# Altium PCB black_V61.PcbDoc
Units mil, origin at the board's own origin, x right, y up, seen from the top; angles counter-clockwise.
Board outline 3814 x 3789 mil, 2 copper layers (Top Layer, Bottom Layer); 68 components, 79 nets, 208 pads, 54 vias.
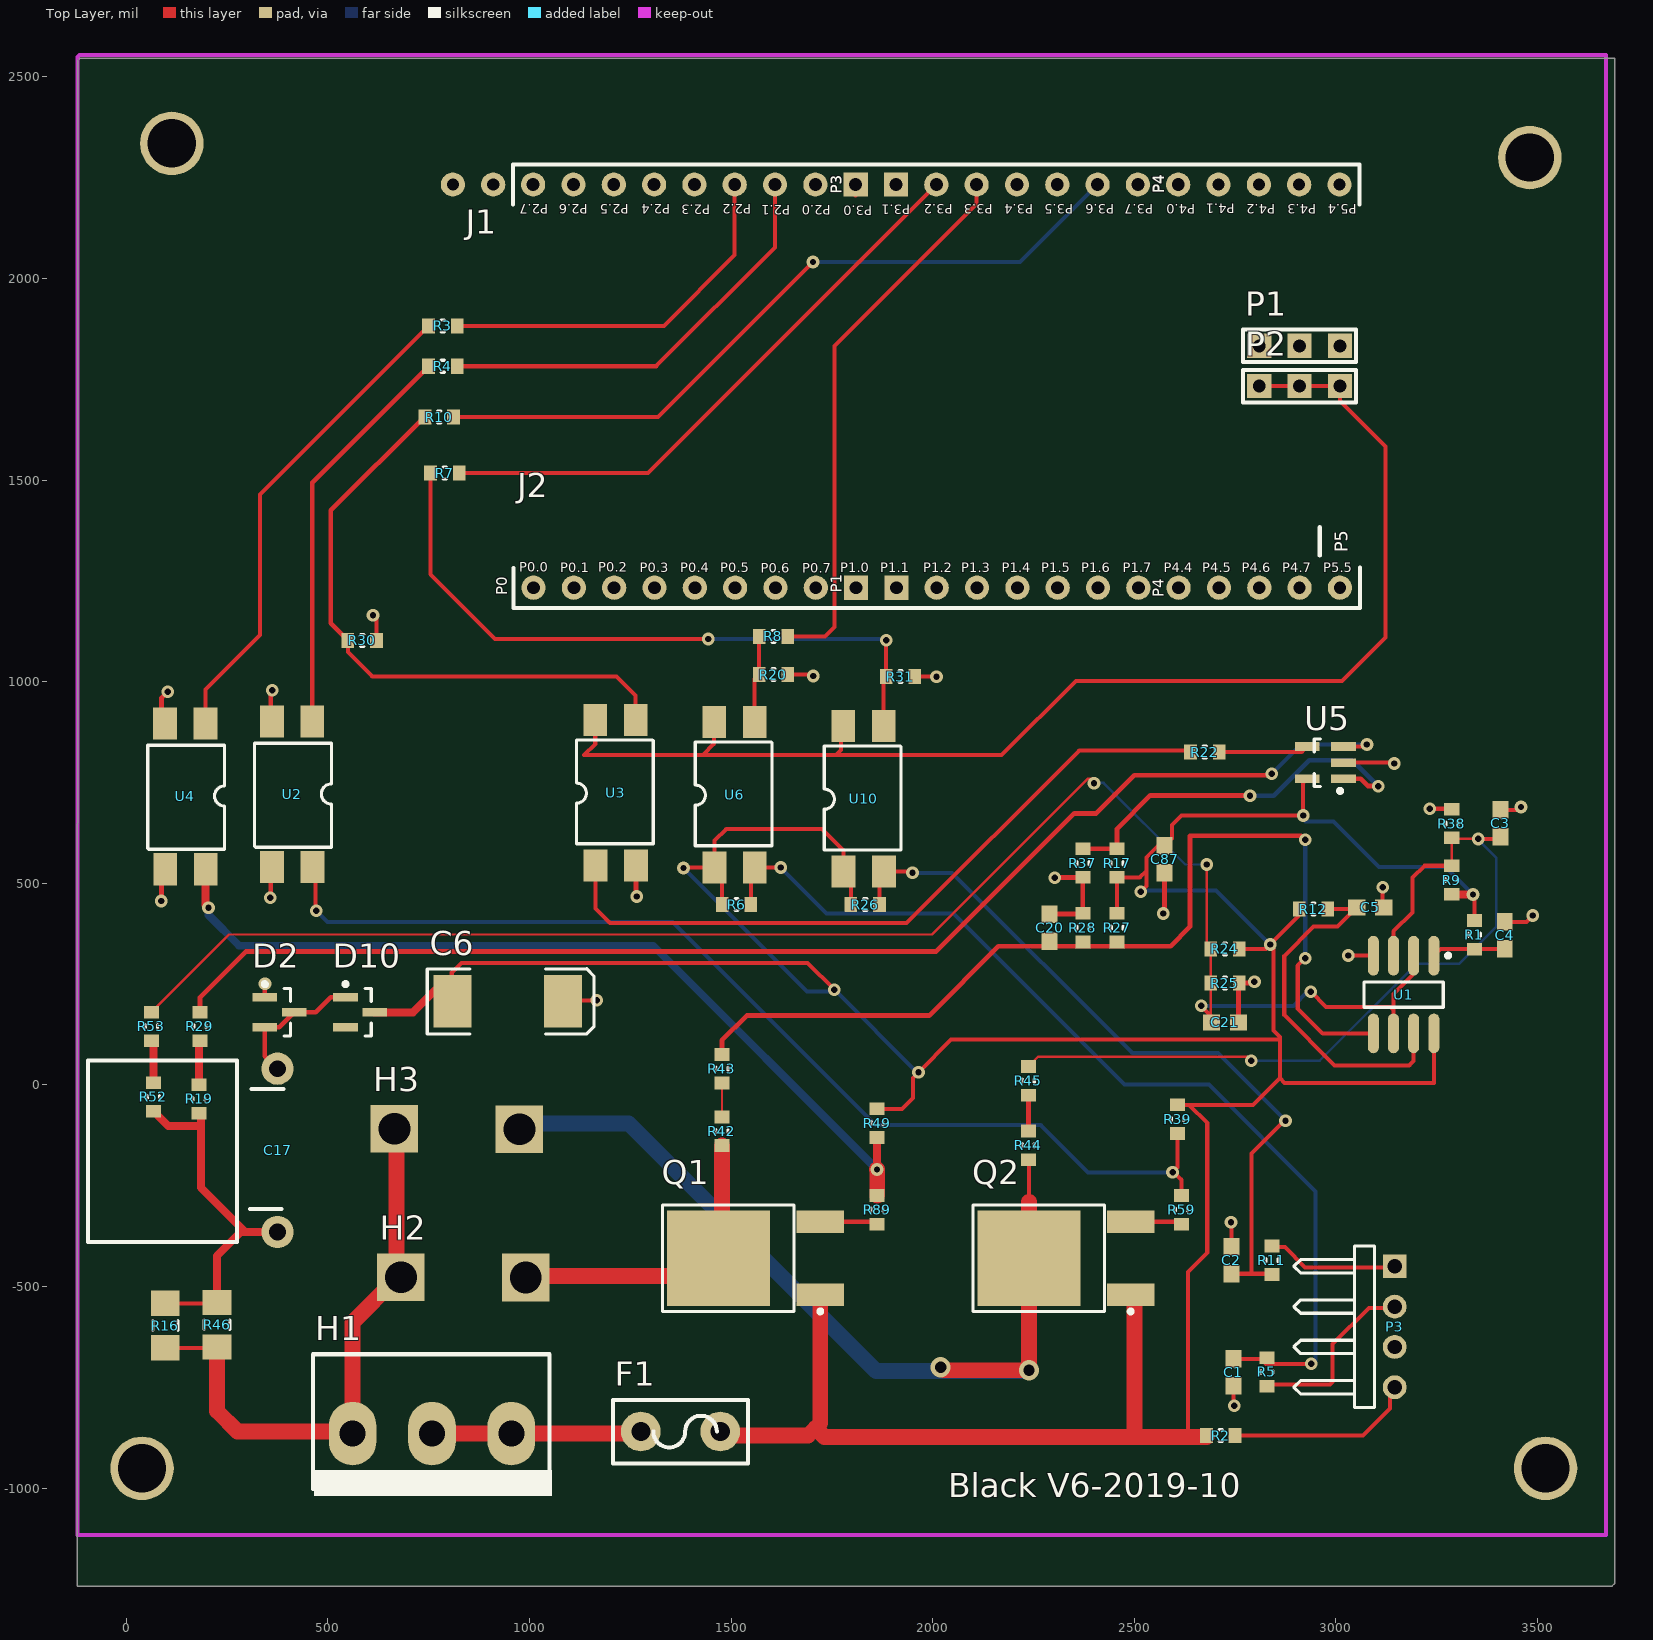
[diagram p0: Top Layer view]
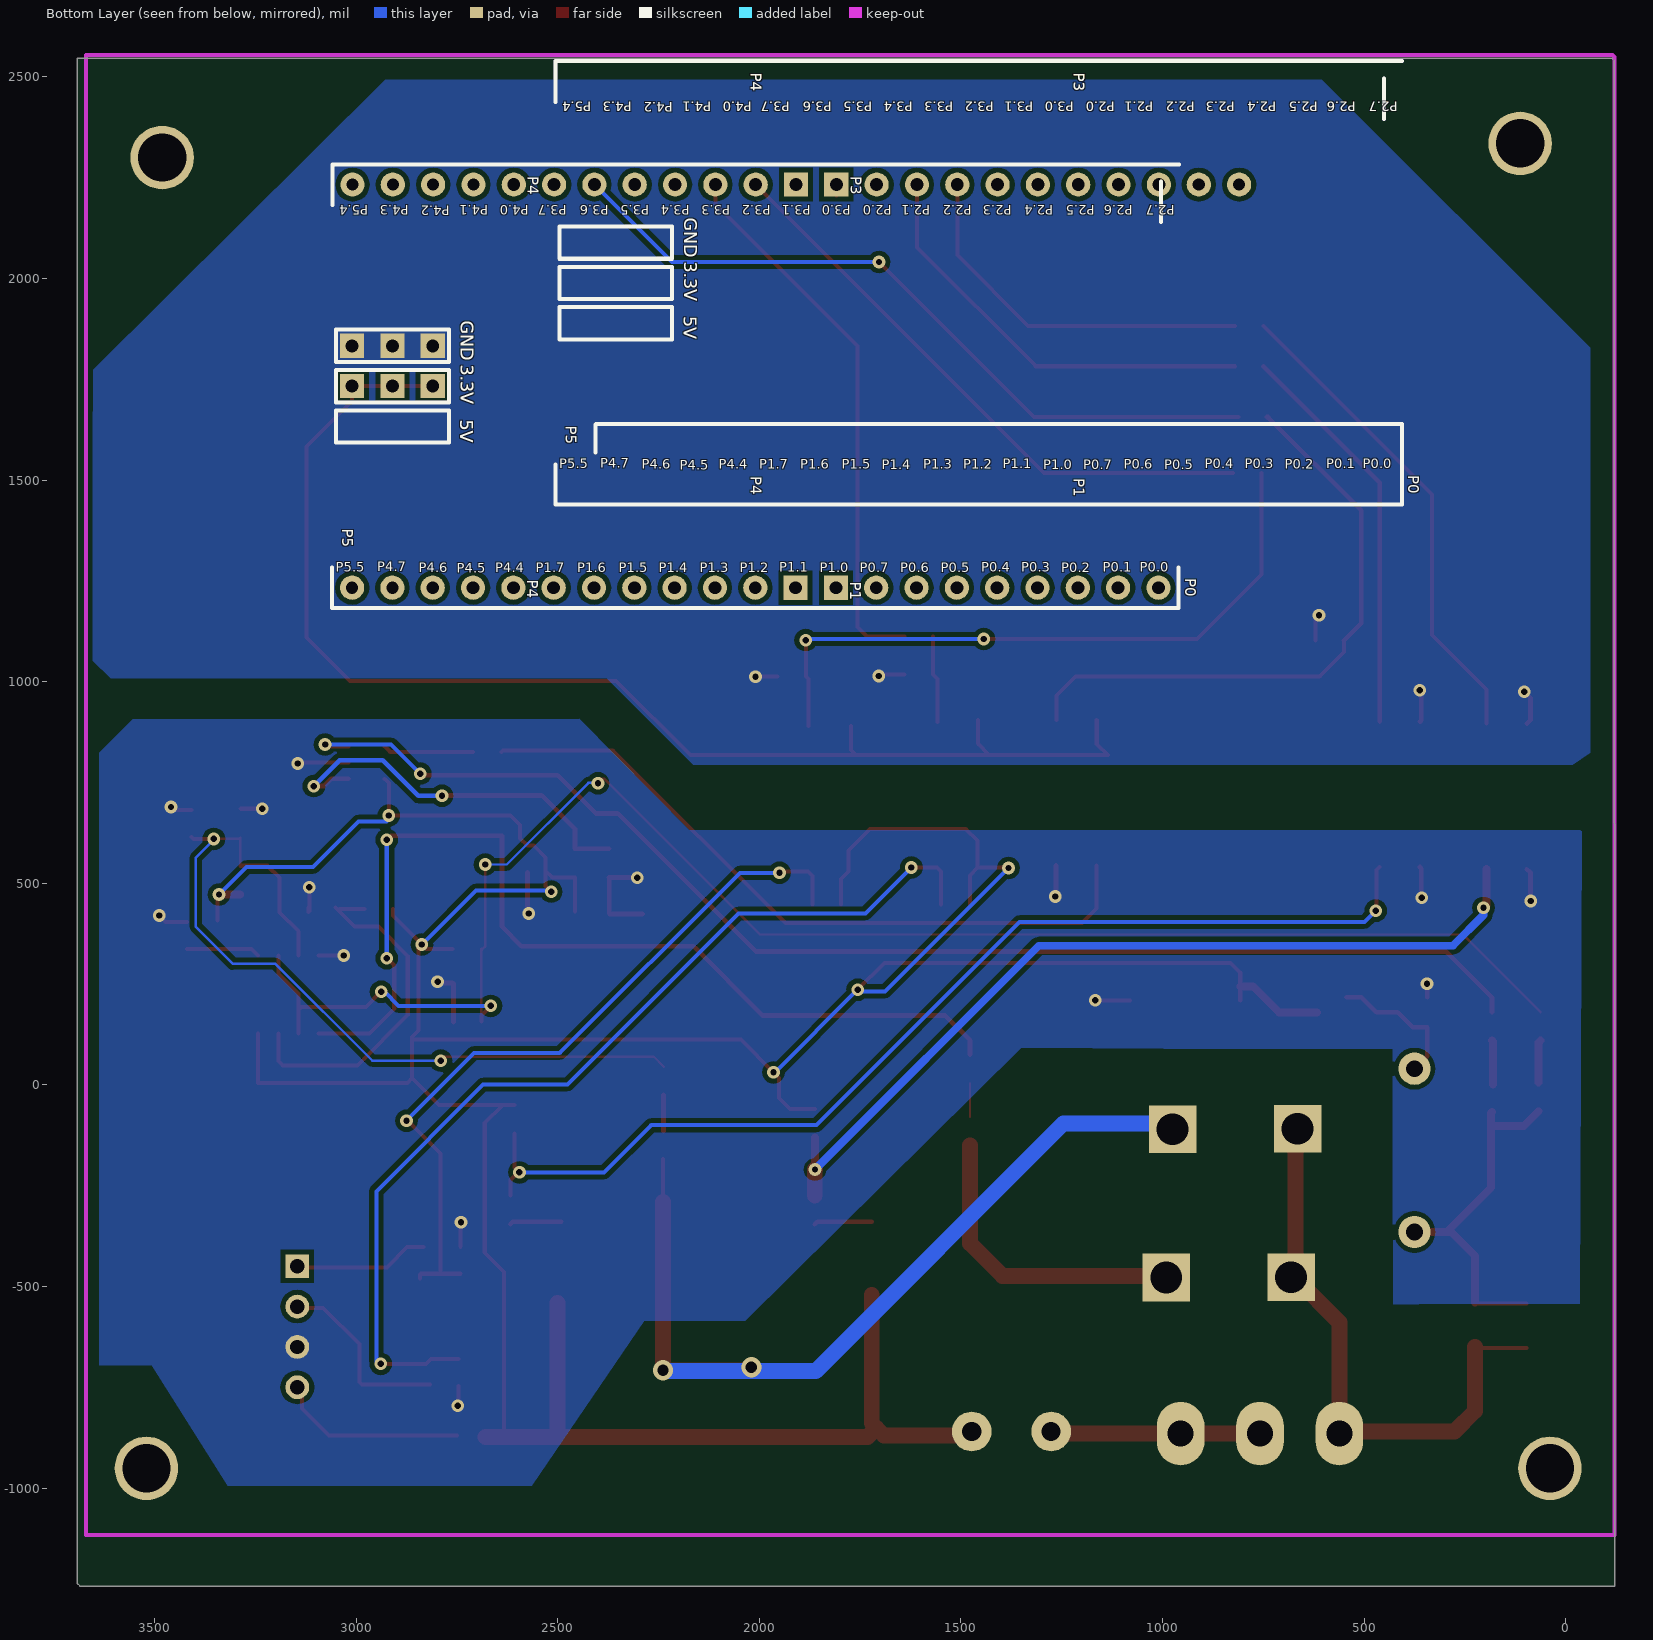
[diagram p1: Bottom Layer view, seen from below]

## Layer stack, top to bottom
Top Solder: solder mask 0.4, Solder Resist, Dk 3.5
Top Layer: signal copper 1.4
Dielectric1: dielectric 12.6, FR-4, Dk 4.8
Bottom Layer: signal copper 1.4
Bottom Solder: solder mask 0.4, Solder Resist, Dk 3.5

## Board outline
-121,2540 -115,2546 3692,2546 3692,-1236 3685,-1243 -122,-1243

## Design rules (kind name [scope] priority, off if disabled: settings)
Clearance Clearance_1 [All] p1: gap=11.81 ignorepadtopadclearanceinfootprint=FALSE except(0: Arc-Hole Track-Hole SMDPad-Hole THPad-Hole Via-Hole Fill-Hole Poly-Hole Region-Hole Text-Hole)
Clearance [All] p2 off: gap=8 ignorepadtopadclearanceinfootprint=FALSE except(0: Arc-Hole Track-Hole SMDPad-Hole THPad-Hole Via-Hole Fill-Hole Poly-Hole Region-Hole Text-Hole)
FabricationTestPointUsage TestPointUsage [All] p1: valid=0 allowmultiple=FALSE
FabricationTestpoint Testpoint [All] p1: side=3 testpointundercomponent=TRUE minsize=40 maxsize=100 preferedsize=60 minholesize=0 maxholesize=40 preferedholesize=32 testpointgrid=1 allowsidetop=TRUE allowsidebottom=TRUE usegrid=TRUE gridtolerance=0.01
PlaneConnect [All] p1: planeconnectstyle=Direct reliefexpansion=20 reliefentries=4 reliefconductorwidth=10 reliefairgap=10
PolygonConnect [All] p1: connectstyle=Direct reliefconductorwidth=10 reliefentries=4 polygonreliefangle="90 Angle" airgapwidth=10
RoomDefinition black_V6 [InComponentClass('black_V6')] p1: confinementstyle=ConfineIn formatcopy=TRUE lockcomponents=FALSE outline -122,-1249 3730,-1249 3730,2533 -122,2533
RoutingVias [All] p1: holewidth=15.75 width=31.5 viastyle="Through Hole" minholewidth=15.75 minwidth=31.5 maxholewidth=15.75 maxwidth=31.5
ShortCircuit [All] p1 off: allowed=FALSE
SilkToSolderMaskClearance SilkscreenOverComponentPads [IsPad] p1: minsilkscreentomaskgap=10 clearancetoexposedcopper=TRUE
SolderMaskExpansion [All] p1: expansion=4
UnRoutedNet [All] p1 off:
Width [All] p1: maxlimit=78.74 minlimit=6 preferedwidth=10 minimp=50.000000 maximp=50.000000 favimp=50.000000
24 further rules are at their usual default settings.

## Components (designator, comment, footprint, x,y, rotation, side; value= is the part's Value field where it differs from the comment)
C1 "0.01u" 1608[0603] 2746,-713 r270 top
C2 "0.01u" 1608[0603] 2741,-435 r90 top
C3 "0.1u" 1608[0603] 3408,648.54 r90 top
C4 "0.01u" 1608[0603] 3419,371 r90 top
C5 "0.01u" 1608[0603] 3085,440 r0 top
C6 "Tan-cap" SMC 946,207 r0 top value=100uF
C17 "220n" filmcap 120,-255 r180 top
C20 "0.1u" 1608[0603] 2290,390 r90 top
C21 "0.1u" 1608[0603] 2725,155 r0 top
C87 "0.1u" 1608[0603] 2575,560 r90 top
D2 "BAT54S" SOT23_D 355,180 r270 top
D10 "BZX84-C5V1" SOT23_D 555,180 r270 top
F1 "Fuse 1A" FUSE_L 1355,-840 r270 top
H1 "MOT" H_3 760,-865 r0 top
H2 "MOT1" MOT 991,-537 r180 top
H3 "MOT2" MOT 975,-169.06 r180 top
J1 "" J1 1009,2233 r0 top
J2 "" J2 1010,1233 r0 top
P1 "Header 3" PP 3010,1833 r180 top locked
P2 "Header 3" PP 3010,1733 r180 top locked
P3 "Header 4H" HDR1X4H 3146,-450 r270 top
Q1 "BTA204S-800C" SCR 1630,-455 r180 top
Q2 "BTA204S-800C" SCR 2400,-455 r180 top
R1 "20k" R0603 3346,352 r180 top
R2 "200" R0603 2734.43,-867.64 r270 top
R3 "0" R0603 765,1880 r90 top
R4 "0" R0603 765,1780 r90 top
R5 "2k" R0603 2826.46,-692 r0 top
R6 "10k" R0603 1533.43,449.36 r270 top
R7 "0" R0603 770,1515 r90 top
R8 "0" R0603 1585,1110 r90 top
R9 "20k" R0603 3285,528 r0 top
R10 "0" R0603 756,1654 r90 top
R11 "2k" R0603 2839,-415 r0 top
R12 "20k" R0603 2964.43,438.36 r270 top
R16 "470" 3216[1206] 97,-597 r90 top
R17 "20k" R0603 2455,570 r0 top
R19 "470K" R0603 182.64,-54.96 r180 top
R20 "10k" R0603 1585,1015 r90 top
R22 "3k" R0603 2655,823 r90 top
R24 "20k" R0603 2705,335 r90 top
R25 "20k" R0603 2745,255 r270 top
R26 "10k" R0603 1852.43,449.36 r270 top
R27 "20k" R0603 2460,370 r180 top
R28 "20k" R0603 2370,410 r0 top
R29 "470K" R0603 185,125 r180 top
R30 "10k" R0603 565,1100 r90 top
R31 "10k" R0603 1900,1010 r90 top
R37 "20k" R0603 2375,530 r180 top
R38 "20k" R0603 3285,668 r0 top
R39 "10k" R0603 2605,-65 r0 top
R42 "330K" R0603 1475,-95 r0 top
R43 "330K" R0603 1475,60 r0 top
R44 "330K" R0603 2235,-130 r0 top
R45 "330K" R0603 2235,30 r0 top
R46 "470" 3216[1206] 225,-595 r90 top
R49 "10k" R0603 1860,-75 r0 top
R52 "330K" R0603 65,-10 r0 top
R53 "330K" R0603 60,165 r0 top
R59 "33" R0603 2615,-290 r0 top
R89 "33" R0603 1860,-290 r0 top
U1 "LM393" SO8_M 3168,224 r270 top
U2 "PS2501" DIP-4SMD 405,725 r270 top
U3 "PS2501" DIP-4SMD 1220,720 r90 top
U4 "PS2501" DIP-4SMD 140,720 r270 top
U5 "LM321" SOT23-5 3214,934 r90 top
U6 "PS2501" DIP-4SMD 1515,715 r90 top
U10 "PS2501" DIP-4SMD 1835,705 r90 top

## Footprints (in the part's own frame and the unit in brackets; to place one, negate y for a bottom-side part, rotate by r counter-clockwise, add the part's x,y. Pads: shape width x height; smd on the part's side, far side on the other; paste and mask are expansions set on the pad)
1608[0603] [mm] "Chip Capacitor; Body 1.6 x 0.8 mm (LxW typ)"
  rect 1.1x1 smd: 1(-0.85,0) 2(0.85,0)
3216[1206] [mm] "Chip Resistor; Body 3.2 x 1.6 mm (LxW typ)"
  rect 1.6x1.8 smd: 1(-1.4,0) 2(1.4,0)
  silkscreen extent -0.3,-0.8 0.3,0.8
DIP-4SMD [mil]
  rect 80x59.06 smd: 1(-176.07,56.13) 2(-176.07,-43.87) 3(184.95,-43.47) 4(184.95,56.92)
  silkscreen extent -122,-87 136,104
filmcap [mil]
  round 80 hole 42: 1(-255,110) 2(-255,-295)
  silkscreen extent -270,-315 215,135
FUSE_L [mm]
  round 2.5 hole 1.2: 1(0.5,3) 2(0.5,-2)
  silkscreen extent -1.49,-3.75 2.51,4.75
H_3 [mm]
  oval 3x4 hole 1.65: 1(-5.047,0) 2(-0.047,0) 3(4.953,0)
  silkscreen extent -7.55,-3.94 7.51,5
HDR1X4H [mm] "Connector; Header; 4 Position; Right Angle"
  rect 1.5x1.5 hole 0.9: 1(0,0)
  round 1.5 hole 0.9: 2(2.54,0) 3(5.08,0) 4(7.62,0)
  silkscreen extent -1.27,-6.35 8.89,-1.27
J1 [mil]
  round 60 hole 32: 1(0,0) 2(100,0) 3(200,0) 4(300,0) 5(400,0) 6(500,0) 7(600,0) 8(700,0) 11(1000,0) 12(1100,0) 13(1200,0) 14(1300,0) 15(1400,0) 16(1500,0) 17(1600,0)
  rect 60x60 hole 32: 9(800,0) 10(900,0)
  round 60 hole 30: 18(1700,0) 19(1800,0) 20(1900,0) 21(2000,0)
  silkscreen extent -50,-50 2050,50
J2 [mil]
  round 60 hole 32: 1(0,0) 2(100,0) 3(200,0) 4(300,0) 5(400,0) 6(500,0) 7(600,0) 8(700,0) 11(1000,0) 12(1100,0) 13(1200,0) 14(1300,0) 15(1400,0) 16(1500,0) 17(1600,0) 18(1700,0)
  rect 60x60 hole 32: 9(800,0) 10(900,0)
  round 60 hole 30: 19(1800,0) 20(1900,0) 21(2000,0)
  silkscreen extent -50,-50 2050,50
MOT [mm]
  rect 3x3 hole 2: 1(0,-1.5) 2(7.874,-1.524)
PP [mil]
  rect 60x60 hole 32: 1(0,0) 2(100,0) 3(200,0)
  silkscreen extent -40,-40 240,40
R0603 [mm]
  rect 0.95x0.8 smd: 1(0.06,0.392) 2(0.06,-1.408)
  silkscreen extent -0.32,-0.61 0.44,-0.41, body extent -0.39,-1.36 0.51,0.34, height 0.6
SCR [mm]
  rect 6.5x6 smd: 1(4.095,-0.635)
  rect 3x1.4 smd: 2(-2.315,-2.935) 3(-2.315,1.665)
  silkscreen extent -2.44,-3.98 7.62,2.84, body extent -1.21,-3.99 7.24,2.72, height 1.8
SMC [mm] "DO-214-AB/SMC; 2 C-Bend Leads; Body 7.9 x 5.9 mm, inc. leads (LxW)"
  rect 2.4x3.3 smd: 1(-3.475,0) 2(3.475,0)
  silkscreen extent -5.07,-2.05 5.43,2.05
SO8_M [mm] "SOIC, 8-Leads, Body 4.9x3.9mm, Pitch 1.27mm, IPC Low Density"
  oval 2.5x0.7 smd: 1(-2.45,1.905) 2(-2.45,0.635) 3(-2.45,-0.635) 4(-2.45,-1.905) 5(2.45,-1.905) 6(2.45,-0.635) 7(2.45,0.635) 8(2.45,1.905)
  silkscreen extent -2.57,-2.5 0.8,2.93, body extent -2,-2.5 2,2.5, height 1.75
SOT23-5 [mm]
  rect 0.55x1.55 smd: 1(-4.445,4.953) 2(-3.429,4.953) 3(-2.413,4.953) 4(-2.413,7.239) 5(-4.445,7.239)
  silkscreen extent -5.33,5.05 -1.93,6.8, body extent -4.93,5.4 -1.93,6.8, height 1.1
SOT23_D [mm]
  rect 0.55x1.55 smd: 1(-0.95,-0.29) 2(0.95,-0.29) 3(0,1.56)
  silkscreen extent -1.9,-0.41 1.5,1.34, body extent -1.5,-0.06 1.5,1.34, height 1.1

## Part data
C1 C2 C3 C4 C5 C17 C20 C21 C87: library part "CAP NP", "CAP NL", manufacturer=Yageo, part number=CC0603KRX7R9BB103, remark="C-CAP 10N 50V X7R  0603 K"
C6: library part "Cap Pol1", "Polarized Capacitor (Radial)", LatestRevisionDate=17-Jul-2002, LatestRevisionNote="Re-released for DXP Platform.", PackageReference=RB7.6-15, Published=8-Jun-2000, Publisher="Altium Limited"
D2: manufacturer=Vishay, Package=SOT23, Cost=0.04, Digikey=http://www.digikey.com/product-detail/en/BAT54S-HE3-18/BAT54S-HE3-18-ND/4826904, Part=BAT54s
D10: library part "D Zener", "Zener Diode", manufacturer=NXP, Package=SOT23, Cost=0.02, Digikey=http://www.digikey.com/product-detail/en/BZX84-C5V1,215/568-1677-2-ND/763281, LatestRevisionDate=17-Jul-2002, LatestRevisionNote="Re-released for DXP Platform.", PackageReference=DIODE-0.7, Part=BZX84-C5V1, Published=8-Jun-2000, Publisher="Altium Limited"
F1: library part "Fuse 2", "Fuse", manufacturer=Littelfuse, Package=Axial, Cost=0.3, Digikey=http://www.digikey.com/product-detail/en/0251001.MXL/F2313-ND/700718, LatestRevisionDate=17-Jul-2002, LatestRevisionNote="Re-released for DXP Platform.", PackageReference=PIN-W2/E2.8, Part=0251001MXL, Published=8-Jun-2000, Publisher="Altium Limited"
H1: library part "Header 3", "Header, 3-Pin", manufacturer=Melexis, Package=TO-92, Cost=0.4, Digikey=http://www.digikey.com/product-detail/en/US1881EUA-AAA-000-BU/US1881EUA-AAA-000-BU-ND/431867, LatestRevisionDate=17-Jul-2002, LatestRevisionNote="Re-released for DXP Platform.", Part=US1881, Publisher="Altium Limited"
H2 H3: library part "Header 2", "Header, 2-Pin", LatestRevisionDate=17-Jul-2002, LatestRevisionNote="Re-released for DXP Platform.", Publisher="Altium Limited"
J1: library part P152
J2: library part P151
P1 P2: "Header, 3-Pin", LatestRevisionDate=17-Jul-2002, LatestRevisionNote="Re-released for DXP Platform.", Publisher="Altium Limited"
P3: "Header, 4-Pin, Right Angle", LatestRevisionDate=17-Jul-2002, LatestRevisionNote="Re-released for DXP Platform.", Publisher="Altium Limited"
Q1 Q2: library part SCR, "Silicon Controlled Rectifier", manufacturer=NXP, Package=DPAK, Code_JEDEC=TO-220-AB, Cost=0.24, Digikey=http://www.digikey.com/product-detail/en/BTA204S-800C,118/568-9608-2-ND/1155228, LatestRevisionDate=17-Jul-2002, LatestRevisionNote="Re-released for DXP Platform.", PackageReference=TO-220-AB, Part=BTA204S-800C, Published=8-Jun-2000, Publisher="Altium Limited"
R1 R2 R3 R4 R5 R6 R7 R8 R9 R10 R11 R12 R16 R17 R19 R20 R22 R24 R25 R26 R27 R28 R29 R30 R31 R37 R38 R42 R43 R44 R45 R46 R49 R52 R53 R59 R89: library part RES, "RES", manufacturer=Yageo, part number=RC0603JR-071KL, remark="RES-TF 1K  0.1W 0603 5%"
R39: "RES", manufacturer=Yageo, part number=RC0603JR-071KL, remark="RES-TF 1K  0.1W 0603 5%"
U2 U3 U4 U6 U10: library part Optoisolator1, "4-Pin Phototransistor Optocoupler", DatasheetDocument=Nov-2003, LatestRevisionDate=04-Mar-2005, LatestRevisionNote="Sch pins 3 & 4 Swapped.", PackageReference=DIP-4, Published=24-Mar-1999, Publisher="Altium Limited"

## Free pads (board coordinates)
  round 60 hole 30: 0(910,2233) 1(810,2233)
  round 157.48 hole 120.08: 3(39,-951) 3(113,2335) 3(3481,2300) 3(3520,-951)

## Via types
v1: diameter 31.5, hole 15.75, Top Layer to Bottom Layer, tented both sides, 52 vias
v2: diameter 50, hole 28, Top Layer to Bottom Layer, tented both sides, 2 vias

## Nets (pads, with @x,y where several pads share a name; then routed paths per layer and width w, separated by ;. In a path a pad name is that pad's centre, name@x,y a point inside that pad or via, vN(x,y) a via of type N, cw(c..) or ccw(c..) an arc to the next point about the centre after c; other vN are vias at no path point)
3V3: P2.1 P2.2 P2.3 U3.4 U6.4 U10.4 | length 3253.1
  Top Layer w10: U3.4 1163.08,845.92 1135.16,818 1430,818 ; U6.4@1458.08,904.95 U6.4 1458.08,846.08 1430,818 ; U10.4@1773.08,889.95 1773.08,831.08 1760,818 ; P2.3 P2.2 P2.1 3010,1696 3123,1583 3123,1110 3015,1002 2355,1002 2171,818 1760,818 ; 1430,818 1760,818
5V: C6.1 C87.2 D10.3 F1.1 Q1.3 Q2.3 R1.2 R2.2 R6.2 R9.2 R12.2 R17.2 R24.2 R26.2 R27.2 R39.1 R49.1 U1.8 U5.5 U6.1 U10.1 | length 9782.9
  Top Layer w10: C6.1@807.19,209 807.19,243.74 807.19,278.19 831,302 1690,302 v1(1756,236) ; v1@1382.93,538.93 U6.1 ; R6.2 1478,519.8 U6.1 ; R26.2 1797,510.8 U10.1 1778.87,581.13 1725,635 1488,635 1458.87,605.87 U6.1 ; R49.1 1924.43,-59.57 1951,-33 1951,17 v1(1965,31) 2046,112 2861,112 ; R27.2@2457.36,429.84 R17.2 2513.57,514.57 2530,531 ; v1(2516.29,479.29) 2530,493 2530,531 ; R39.1 2635.57,-49.57 ; 2640,-866 2633,-859 2633,-464 2681,-416 2681,-95 2635.57,-49.57 ; R24.2 2826.36,337.36 v1(2837,348) ; R12.2 2909,420 v1(2837,348) ; U5.5 2919,749 v1(2919,668) 2617,668 2593,644 2593,611.46 C87.2 2559.46,593.46 2530,564 2530,531 ; U1.8 3243,5 2873,5 2861,17 ; v1@3339.43,472.57 v1(3340,472) 3343.64,468.36 R1.2 ; 2635.57,-49.57 2794.43,-49.57 2861,17 ; v1(2837,348) 2845,340 2845,135 2861,119 2861,112 ; 2861,17 2861,112
  Top Layer w19.68: D10.3 711.3,180 775.04,243.74 C6.1@807.19,243.74 ; R9.2 v1@3339.43,472.57
  Top Layer w39.37: F1.1@1472,-869.68 1690.91,-869.68 1709.45,-851.14 ; Q1.3 1721.14,-839.45 1709.45,-851.14 ; Q2.3@2501,-540.55 2501,-873 ; R2.2@2679,-873 2501,-873 ; 1709.45,-851.14 1731.31,-873 2501,-873
  Bottom Layer w10: v1(1382,538) 1688,232 v1@1752,232 ; v1(1756,236) v1@1962,30 ; v1(2516.29,479.29) 2519,482 2703,482 v1(2837,348) ; v1(2919,668) 2919,659 2925,653 2994,653 3106.56,540.44 3271.56,540.44 v1(3340,472)
A: J1.9 | length 27
  Top Layer w10: J1.9@1809,2206 J1.9
AC: R10.1 R30.1 U3.3 | length 1517.8
  Top Layer w10: R30.1 549.57,1073.43 610,1013 1216,1013 1263.47,965.53 U3.3
  Top Layer w11.81: R30.1 507,1144.93 507,1425 738.36,1656.36 R10.1
AC_DET: C17.1 R16.2 R19.1 R46.2 | length 896.5
  Top Layer w10: R16.2 223,-541.88 R46.2
  Top Layer w19.68: 67.36,-65.43 103.93,-102 185,-102 ; R19.1@182.64,-67 185,-69.36 185,-102 ; R46.2 225,-424 284,-365 295,-365 ; C17.1 295,-365 ; 185,-102 185,-255 295,-365
AGND: P1.1 P1.2 P1.3 R20.2 R30.2 R31.2 U2.2 U4.2 | length 356.8
  Top Layer w10: v1(612,1165) 620.43,1156.57 R30.2 ; R20.2 1693.64,1017.36 1695,1016 1702,1016 v1(1704,1014) ; R31.2 v1(2009.64,1012.36)
  Top Layer w11.81: U4.2 87.57,904.64 87.57,959.57 v1(103,975) ; U2.2 358,904.2 358,978 359,979 v1(362,979)
B: J1.10
GND: C1.2 C2.2 C3.2 C4.2 C5.2 C6.2 C20.2 C21.2 C87.1 D2.1 P3.3 R25.1 R28.1 R37.1 R38.1 U1.4 U2.3 U3.2 U4.3 U5.2 | length 1413.6
  Top Layer w10: C6.2@1080.81,209 1166,209 v1(1167,210) ; v1(2740,-341) 2741,-342 C2.2 ; C1.2 2746,-794 v1(2748,-796) ; U5.2 3143,799 v1(3145,797) ; v1(3031,321) 3031.54,320.46 U1.4 ; v1(3116,490) 3116,431 3118.46,428.54 C5.2 ; C3.2 3452,682 v1(3459,689) ; C4.2 3472.46,404.46 v1(3488,420)
  Top Layer w11.81: v1(87,456) 87,525.52 U4.3 ; D2.1 343.58,250.58 v1(344,251) ; v1@358,460 358,536.52 U2.3 ; U3.2 1263.87,468.07 1264.94,467 v1(1266,467) ; C20.2 2370.39,423.46 R28.1 R37.1@2372.36,514.29 ; v1(2303,514) 2372.07,514 R37.1@2372.36,514.29 ; R37.1 R37.1@2372.36,514.29 ; v1(2572,425) 2575,428 C87.1 ; C21.2 2758.46,250.67 R25.1 2801.36,252.64 v1(2798,256) ; v1@3229.46,681.46 v1(3233,685) R38.1@3285.8,685
  other v1: 357,464
HALL1: R8.1 R20.1 U6.3 | length 217
  Top Layer w10: U6.3 1558.47,1006.27 R20.1 R8.1
HALL2: R7.1 R31.1 U10.3 | length 1664
  Top Layer w10: R7.1 754.57,1266.43 915,1106 v1(1443,1106) ; U10.3 1878.47,1006.27 R31.1 v1@1884.57,1102.36
  Bottom Layer w10: v1(1443,1106) 1882,1106 v1(1885,1103)
MOS1: R3.1 U4.1 | length 1215.5
  Top Layer w10: U4.1 196.13,981.13 331,1116 331,1463.8 R3.1
MOS2: R4.1 U2.1 | length 1000.8
  Top Layer w11.81: U2.1 461.13,1493.93 R4.1
MOT1+: H2.1 Q1.1 R42.2 | length 757.1
  Top Layer w39.37: H2.1@1007.5,-447.5 1034,-474 1396.67,-474 1477.36,-393.31 R42.2
MOT2+: H3.1 Q2.1 R44.2 | length 2263.6
  Top Layer w10: 2238.78,-289.78 R44.2@2238.78,-184.02
  Top Layer w39.37: v2(2019.78,-700.22) 2027.56,-708 v2(2238.78,-708) Q2.1 2238.78,-289.78
  Bottom Layer w39.37: H3.1@966,-95.94 1245.94,-95.94 1860,-710 v1@2229,-710
  other v1: 2234,-705
NetC1_1: C1.1 R5.1 R6.1 U6.2 | length 2440
  Top Layer w10: R6.1 1548.87,528.93 U6.2 1622.93,538.93 v1(1623,539) ; C1.1 2814,-679.54 2826.46,-692 v1(2939,-692)
  Bottom Layer w10: v1(1623,539) 1737,425 2052,425 2476,1 2685,1 2950,-264 v1@2950,-686
NetC2_1: C2.1 R11.2 R26.1 U10.2 | length 1866.7
  Top Layer w10: R26.1 1867.87,517.93 U10.2 1947.07,528.93 v1(1950,526) ; C2.1 2794.46,-468.46 ; R11.2@2841.36,-479.64 R11.2 2839.39,-468.46 2794.46,-468.46 ; v1(2875,-89) 2872,-89 2791,-170 2791,-465 2794.46,-468.46
  Bottom Layer w10: v1(1950,526) 2048,526 2495,79 2708,79 v1@2875.5,-88.5
NetC3_1: C3.1 R9.1 R38.2 R45.1 U1.3 | length 2066.9
  Top Layer w6: R45.1 2261.93,70 2780,70 v1(2790,60) ; R9.1 R38.2 3289.93,610 v1(3353,610)
  Top Layer w10: U1.3 3143,381 3190,428 3190,514 3219.43,543.43 R9.1 ; v1(3353,610) 3402.93,610 C3.1
  Bottom Layer w6: v1(2790,60) 2960,60 3200,300 3305,300 3398,393 3398,563 3351,610 v1(3353,610)
NetC4_1: C4.1 R1.1 U1.1 | length 183.1
  Top Layer w10: U1.1 3259.11,336.57 R1.1 3418.03,336.57 C4.1
NetC5_1: C5.1 R12.1 U1.7 | length 882.3
  Top Layer w10: R12.1 C5.1@3040,436 ; C5.1 3004.54,393 2945,393 2872,320 2872,172.85 2996.85,48 3182,48 3193,59 U1.7
NetC17_2: C17.2 D2.2 D2.3 D10.1 | length 346.6
  Top Layer w11.81: C17.2 343.58,71.42 D2.2 379.02,142.6 D2.3 470,180 507.4,217.4 D10.1
NetC20_1: C20.1 R27.1 R28.2 R43.1 U1.5 | length 2467.7
  Top Layer w10: v1(2924,314) 2905.44,295.44 2905.44,189.56 2967.46,127.54 U1.5
  Top Layer w11.81: R43.1 1477.36,110.36 1539,172 1991,172 2163,344 2590,344 2638,392 2638,618 2914,618 v1(2924,608)
  Bottom Layer w11.81: v1(2924,314) v1(2924,608)
NetC21_1: C21.1 R24.1 R25.2 R53.1 U1.2 U1.6 | length 4090.4
  Top Layer w6: R53.1 254.93,373 1998,373 2384,759 v1@2397,759 ; v1(2680.06,546.48) 2680.06,342.74 R24.1@2687.5,335.3 ; C21.1@2689.57,172.43 R25.2 R24.1
  Top Layer w10: v1(2666,196) 2689.57,172.43 C21.1@2689.57,156.97 ; v1(2938,231) 2975.43,193.57 3135.43,193.57 3143,186 ; U1.6 3143,186 ; U1.2 3193,275 3143,225 3143,186
  Bottom Layer w6: v1(2400,748) 2401,749 2424,749 2626.52,546.48 v1(2680.06,546.48)
  Bottom Layer w10: v1(2666,196) 2895,196 2930,231 v1(2938,231)
NetF1_2: F1.2 H1.2 H1.3 | length 510.9
  Top Layer w39.37: H1.2 H1.3 F1.2@1269,-865
NetH1_1: H1.1 H2.2 H3.2 R16.1 R46.1 | length 1453.9
  Top Layer w10: R16.1 223,-652.12 R46.1
  Top Layer w39.37: R46.1 225,-809 276,-860 H1.1@556.3,-860 ; H1.1 561.3,-588.7 670,-480 670,-126 H3.2@649,-105
NetP3_1: P3.1 R11.1 | length 307.9
  Top Layer w10: R11.1@2833,-402.57 2873.57,-402.57 2924,-453 P3.1@3120,-453
NetP3_2: P3.2 R5.2 | length 437.4
  Top Layer w10: R5.2@2816.36,-743 2986,-743 2992,-737 2992,-643 3082,-553 P3.2@3120,-553
NetP3_4: P3.4 R2.1 | length 471
  Top Layer w10: R2.1 3067,-870 3134,-803 3134,-767 3139,-772 P3.4@3139,-756
NetQ1_2: Q1.2 R89.2 | length 143.7
  Top Layer w11.81: Q1.2 1856.38,-339.45 R89.2
NetQ2_2: Q2.2 R59.2 | length 128.7
  Top Layer w11.81: Q2.2 2611.38,-339.45 R59.2
NetR17_1: R17.1 R37.2 U5.1 | length 973.4
  Top Layer w11.81: R37.2 R17.1 2457.36,635.36 2540,718 2786,718 v1(2787,717) ; U5.1 3062,759 3080,741 v1(3105,741)
  Bottom Layer w11.81: v1(2787,717) 2846,717 2934,805 3041,805 v1(3105,741)
NetR19_2: R19.2 R29.1 | length 110.1
  Top Layer w19.68: R19.2 180.28,107.2 R29.1
NetR22_1: R22.1 U3.1 | length 1776.7
  Top Layer w10: U3.1 1163.87,437.13 1200,401 1935,401 2363.56,829.56 2635.37,829.56 R22.1
NetR22_2: R22.2 U5.4 | length 224.2
  Top Layer w10: R22.2 2915.36,825.36 U5.4
NetR29_2: R29.2 U5.3 | length 3247.4
  Top Layer w10: U5.3 3072,839 v1(3077,844)
  Top Layer w11.81: R29.2 182.64,216.64 297,331 2009,331 2351.25,673.25 2405.25,673.25 2500,768 v1@2839.53,768
  Bottom Layer w10: v1(2841,772) 2913,844 v1(3077,844)
NetR39_2: R39.2 R59.1 U2.4 | length 2668.4
  Top Layer w10: U2.4 469.57,532.4 v1@469.57,437.36 ; v1(2595,-217) v1@2597,-215 ; R39.2 2607.36,-204.64 v1@2597,-215 ; R59.1 2617.36,-235.36 v1@2597,-215
  Bottom Layer w10: v1(471,432) 499,404 1354.56,404 1858.56,-100 2268,-100 2385,-217 v1(2595,-217)
NetR42_1: R42.1 R43.2 | length 84.1
  Top Layer w6: R42.1 R43.2
NetR44_1: R44.1 R45.2 | length 89.1
  Top Layer w11.81: R44.1 R45.2
NetR49_2: R49.2 R89.1 U4.4 | length 2180.3
  Top Layer w19.68: U4.4 196.92,446.08 v1(204,439) ; v1@1862.36,-209.64 R49.2
  Top Layer w39.37: v1(1862,-210) 1862.36,-210.36 R89.1
  Bottom Layer w19.68: v1(204,439) 204,421 280,345 1307,345 v1(1862,-210)
NetR52_1: R52.1 R53.2 | length 106.2
  Top Layer w19.68: R53.2 67.36,104.57 R52.1
P00: J2.1 | length 22.1
  Top Layer w10: J2.1@994.36,1217.36 J2.1
P01: J2.2
P02: J2.3
P03: J2.4
P04: J2.5
P05: J2.6
P06: J2.7
P07: J2.8
P10: J2.9
P11: J2.10
P12: J2.11
P13: J2.12
P14: J2.13
P15: J2.14
P16: J2.15
P17: J2.16
P20: J1.8
P21: J1.7 R4.2 | length 1066.6
  Top Layer w10: R4.2 1314.36,1782.36 1609,2077 J1.7
P22: J1.6 R3.2 | length 936.3
  Top Layer w10: R3.2 1333.36,1882.36 1509,2058 J1.6
P23: J1.5
P24: J1.4
P25: J1.3
P26: J1.2
P27: J1.1
P32: J1.11 R7.2 | length 1480
  Top Layer w10: R7.2 1293.36,1517.36 J1.11
P33: J1.12 R8.2 | length 1369.2
  Top Layer w10: R8.2 1733.36,1112.36 1756.81,1135.81 1756.81,1832.81 2109,2185 J1.12
P34: J1.13
P35: J1.14
P36: J1.15 R10.2 | length 1855.4
  Top Layer w10: R10.2 1318.36,1656.36 v1(1703,2041) ; J1.15@2409,2214 J1.15
  Bottom Layer w10: v1(1703,2041) 2217,2041 J1.15
P37: J1.16
P40: J1.17
P41: J1.18
P42: J1.19
P43: J1.20
P44: J2.17
P45: J2.18
P46: J2.19
P47: J2.20
P54: J1.21
P55: J2.21
pads on no net: D10.2 R52.2

## Polygon pours and split planes (outlines as drawn)
GND on Bottom Layer "Top Layer-No Net" (solid, pour order 1001): -40,632 2174,632 2447,908 3554,907 3637,824 3637,-695 3507,-695 3319,-994 2564,-994 2285,-585 2035,-585 1350,92 997,89 429,89 428,-544 365,-544 -34.97,-542.87
AGND on Bottom Layer "Top Layer-No Net" (solid, pour order 1000): -17,794 2164,794 2378,1008 3609,1008 3655,1054 3652,1774 2928,2493 605,2493 -61,1828 -61,824

## Keep-outs
Keep-Out Layer:
  lines w10: 2518,2554 3670,2554 3670,-1116 -121,-1116 -121,2549 ; 2528,2554 -116,2554 ; -121,2549 -116,2554 ; -121,2549 -116,2554

## Silkscreen, mask and mechanical layers (free items; w line width, h text height)
Top Overlay:
  lines w10: 2960,1313 2960,1383
  text "P4" at 2574,2212 h27.56 r90
  text "P4" at 2574,2212 h27.56 r90
  text "P3" at 1775,2210 h27.56 r90
  text "P3" at 1775,2210 h27.56 r90
  text "P5" at 3030,1321 h31.5 r90
  text "Black V6-2019-10" at 2039,-1023 h60
Bottom Overlay:
  lines w10: 2406,1568 2406,1638 2405,1639 406,1639 406,1539 406,1439 2506,1439 2506,1539 ; 2216,1849 2216,1929 ; 2216,1849 2496,1849 ; 2216,1849 2216,1929 ; 2216,1849 2496,1849 ; 2216,1929 2496,1929 ; 2216,1929 2496,1929 ; 2216,1949 2216,2029 ; 2216,1949 2496,1949 ; 2216,1949 2216,2029 ; 2216,1949 2496,1949 ; 2216,2029 2496,2029 ; 2216,2029 2496,2029 ; 2216,2049 2216,2129 ; 2216,2049 2496,2049 ; 2216,2049 2216,2129 ; 2216,2049 2496,2049 ; 2216,2129 2496,2129 ; 2216,2129 2496,2129 ; 2496,1849 2496,1929 ; 2496,1849 2496,1929 ; 2496,1949 2496,2029 ; 2496,1949 2496,2029 ; 2496,2049 2496,2129 ; 2496,2049 2496,2129 ; 2506,2539 2506,2438 2506,2539 ; 2506,2539 406,2539 2506,2539 ; 2770,1593 2770,1673 ; 2770,1593 3050,1593 ; 2770,1593 2770,1673 ; 2770,1593 3050,1593 ; 2770,1593 2770,1673 ; 2770,1593 3050,1593 ; 2770,1673 3050,1673 ; 2770,1673 3050,1673 ; 2770,1673 3050,1673 ; 2770,1693 2770,1773 ; 2770,1693 3050,1693 ; 2770,1693 2770,1773 ; 2770,1693 3050,1693 ; 2770,1693 2770,1773 ; 2770,1693 3050,1693 ; 2770,1773 3050,1773 ; 2770,1773 3050,1773 ; 2770,1773 3050,1773 ; 2770,1793 2770,1873 ; 2770,1793 3050,1793 ; 2770,1793 2770,1873 ; 2770,1793 3050,1793 ; 2770,1793 2770,1873 ; 2770,1793 3050,1793 ; 2770,1873 3050,1873 ; 2770,1873 3050,1873 ; 2770,1873 3050,1873 ; 3050,1593 3050,1673 ; 3050,1593 3050,1673 ; 3050,1593 3050,1673 ; 3050,1693 3050,1773 ; 3050,1693 3050,1773 ; 3050,1693 3050,1773 ; 3050,1793 3050,1873 ; 3050,1793 3050,1873 ; 3050,1793 3050,1873 ; 451,2396 451,2496 451,2396
  text "P3" at 1220,2510 h27.56 r90
  text "P3" at 1220,2510 h27.56 r90
  text "P4" at 2021,2510 h27.56 r90
  text "P4" at 2021,2510 h27.56 r90
  text "P2.7" at 416,2438 h23.62 r180
  text "P2.7" at 416,2438 h23.62 r180
  text "P2.6" at 521,2438 h23.62 r180
  text "P2.6" at 521,2438 h23.62 r180
  text "P2.5" at 615,2438 h23.62 r180
  text "P2.5" at 615,2438 h23.62 r180
  text "P2.4" at 718,2438 h23.62 r180
  text "P2.4" at 718,2438 h23.62 r180
  text "P2.3" at 821,2438 h23.62 r180
  text "P2.3" at 821,2438 h23.62 r180
  text "P2.2" at 920,2438 h23.62 r180
  text "P2.2" at 920,2438 h23.62 r180
  text "P2.1" at 1023,2438 h23.62 r180
  text "P2.1" at 1023,2438 h23.62 r180
  text "P2.0" at 1119,2438 h23.62 r180
  text "P2.0" at 1119,2438 h23.62 r180
  text "P3.0" at 1220,2438 h23.62 r180
  text "P3.0" at 1220,2438 h23.62 r180
  text "P3.1" at 1320,2438 h23.62 r180
  text "P3.1" at 1320,2438 h23.62 r180
  text "P3.2" at 1419,2438 h23.62 r180
  text "P3.2" at 1419,2438 h23.62 r180
  text "P3.3" at 1519,2438 h23.62 r180
  text "P3.3" at 1519,2438 h23.62 r180
  text "P3.4" at 1619,2438 h23.62 r180
  text "P3.4" at 1619,2438 h23.62 r180
  text "P3.5" at 1720,2438 h23.62 r180
  text "P3.5" at 1720,2438 h23.62 r180
  text "P3.6" at 1820,2438 h23.62 r180
  text "P3.6" at 1820,2438 h23.62 r180
  text "P3.7" at 1924,2438 h23.62 r180
  text "P3.7" at 1924,2438 h23.62 r180
  text "P4.0" at 2019,2438 h23.62 r180
  text "P4.0" at 2019,2438 h23.62 r180
  text "P4.1" at 2119,2438 h23.62 r180
  text "P4.1" at 2119,2438 h23.62 r180
  text "P4.3" at 2316,2438 h23.62 r180
  text "P4.3" at 2316,2438 h23.62 r180
  text "P5.4" at 2417,2438 h23.62 r180
  text "P5.4" at 2417,2438 h23.62 r180
  text "P4.2" at 2215,2437 h23.62 r180
  text "P4.2" at 2215,2437 h23.62 r180
  text "GND" at 2186,2151 h31.5 r90
  text "GND" at 2186,2151 h31.5 r90
  text "3.3V" at 2186,2042 h31.5 r90
  text "3.3V" at 2186,2042 h31.5 r90
  text "5V" at 2188,1906 h31.5 r90
  text "5V" at 2188,1906 h31.5 r90
  text "GND" at 2740,1895 h31.5 r90
  text "GND" at 2740,1895 h31.5 r90
  text "GND" at 2740,1895 h31.5 r90
  text "3.3V" at 2740,1786 h31.5 r90
  text "3.3V" at 2740,1786 h31.5 r90
  text "3.3V" at 2740,1786 h31.5 r90
  text "5V" at 2742,1650 h31.5 r90
  text "5V" at 2742,1650 h31.5 r90
  text "5V" at 2742,1650 h31.5 r90
  text "P5" at 2480,1635 h27.56 r90
  text "P4.7" at 2394,1530 h23.62
  text "P0.0" at 503,1529 h23.62
  text "P0.1" at 594,1529 h23.62
  text "P0.3" at 796,1529 h23.62
  text "P0.4" at 895,1529 h23.62
  text "P1.1" at 1396,1529 h23.62
  text "P5.5" at 2496,1529 h23.62
  text "P0.2" at 697,1528 h23.62
  text "P0.6" at 1096,1528 h23.62
  text "P1.2" at 1494,1528 h23.62
  text "P1.3" at 1594,1528 h23.62
  text "P1.5" at 1795,1528 h23.62
  text "P1.6" at 1898,1528 h23.62
  text "P1.7" at 2000,1528 h23.62
  text "P4.4" at 2101,1528 h23.62
  text "P4.6" at 2291,1528 h23.62
  text "P0.5" at 996,1527 h23.62
  text "P0.7" at 1197,1527 h23.62
  text "P1.0" at 1296,1527 h23.62
  text "P1.4" at 1696,1527 h23.62
  text "P4.5" at 2197,1526 h23.62
  text "P0" at 390,1512 h27.56 r90
  text "P4" at 2021,1509 h27.56 r90
  text "P1" at 1220,1504 h27.56 r90

## Text inside footprints (layer, text, board x,y; h text height)
J1: Top Overlay "P5.4" at 3052,2184 h23.62 r180; Top Overlay "P4.3" at 2951,2184 h23.62 r180; Top Overlay "P4.1" at 2749,2185 h23.62 r180; Top Overlay "P4.0" at 2651,2184 h23.62 r180; Top Overlay "P3.7" at 2547,2184 h23.62 r180; Top Overlay "P3.6" at 2450,2184 h23.62 r180; Top Overlay "P3.5" at 2349,2184 h23.62 r180; Top Overlay "P3.4" at 2249,2184 h23.62 r180; Top Overlay "P3.3" at 2149,2184 h23.62 r180; Top Overlay "P3.1" at 1944,2183 h23.62 r180; Top Overlay "P2.7" at 1047,2184 h23.62 r180; Top Overlay "P2.6" at 1144,2184 h23.62 r180; Top Overlay "P2.5" at 1246,2184 h23.62 r180; Top Overlay "P2.1" at 1647,2182 h23.62 r180; Top Overlay "P2.0" at 1747,2182 h23.62 r180; Top Overlay "P3" at 1774,2210 h27.56 r90; Top Overlay "P4" at 2573,2212 h27.56 r90; Top Overlay "P3.2" at 2050,2184 h23.62 r180; Top Overlay "P2.3" at 1448,2183 h23.62 r180; Top Overlay "P2.2" at 1550,2184 h23.62 r180; Top Overlay "P2.4" at 1349,2184 h23.62 r180; Top Overlay "P3.0" at 1850,2181 h23.62 r180; Top Overlay "P4.2" at 2850,2184 h23.62 r180; Bottom Overlay "P4" at 2574,2254 h27.56 r90; Bottom Overlay "P3" at 1773,2254 h27.56 r90; Bottom Overlay "P2.7" at 969,2182 h23.62 r180; Bottom Overlay "P3.0" at 1773,2182 h23.62 r180; Bottom Overlay "P4.1" at 2672,2182 h23.62 r180; Bottom Overlay "P2.6" at 1074,2182 h23.62 r180; Bottom Overlay "P3.7" at 2477,2182 h23.62 r180; Bottom Overlay "P2.4" at 1271,2182 h23.62 r180; Bottom Overlay "P2.3" at 1374,2182 h23.62 r180; Bottom Overlay "P2.2" at 1473,2182 h23.62 r180; Bottom Overlay "P2.1" at 1576,2182 h23.62 r180; Bottom Overlay "P2.0" at 1672,2182 h23.62 r180; Bottom Overlay "P4.0" at 2572,2182 h23.62 r180; Bottom Overlay "P3.6" at 2373,2182 h23.62 r180; Bottom Overlay "P3.5" at 2273,2182 h23.62 r180; Bottom Overlay "P3.4" at 2172,2182 h23.62 r180; Bottom Overlay "P3.3" at 2072,2182 h23.62 r180; Bottom Overlay "P3.2" at 1972,2182 h23.62 r180; Bottom Overlay "P4.2" at 2768,2181 h23.62 r180; Bottom Overlay "P4.3" at 2869,2182 h23.62 r180; Bottom Overlay "P5.4" at 2970,2182 h23.62 r180; Bottom Overlay "P3.1" at 1873,2182 h23.62 r180; Bottom Overlay "P2.5" at 1168,2182 h23.62 r180
J2: Top Overlay "P5" at 3030,1321 h31.5 r90; Top Overlay "P4.4" at 2573,1272 h23.62; Top Overlay "P1.0" at 1771,1271 h23.62; Top Overlay "P4.5" at 2668,1271 h23.62; Top Overlay "P4.6" at 2767,1272 h23.62; Top Overlay "P0" at 945,1214 h27.56 r90; Top Overlay "P1" at 1774,1220 h27.56 r90; Top Overlay "P4" at 2573,1210 h27.56 r90; Top Overlay "P5.5" at 2969,1272 h23.62; Top Overlay "P4.7" at 2867,1271 h23.62; Top Overlay "P1.7" at 2471,1271 h23.62; Top Overlay "P1.5" at 2269,1271 h23.62; Top Overlay "P1.4" at 2171,1271 h23.62; Top Overlay "P1.3" at 2071,1272 h23.62; Top Overlay "P1.2" at 1977,1272 h23.62; Top Overlay "P1.1" at 1870,1272 h23.62; Top Overlay "P0.7" at 1677,1270 h23.62; Top Overlay "P0.6" at 1574,1270 h23.62; Top Overlay "P0.5" at 1473,1271 h23.62; Top Overlay "P0.4" at 1374,1272 h23.62; Top Overlay "P0.3" at 1274,1272 h23.62; Top Overlay "P0.2" at 1170,1273 h23.62; Top Overlay "P0.1" at 1076,1272 h23.62; Top Overlay "P0.0" at 974,1273 h23.62; Top Overlay "P1.6" at 2368,1271 h23.62; Bottom Overlay "P5" at 3034,1379 h27.56 r90; Bottom Overlay "P1.0" at 1850,1271 h23.62; Bottom Overlay "P4.5" at 2751,1270 h23.62; Bottom Overlay "P0" at 944,1256 h27.56 r90; Bottom Overlay "P1.6" at 2452,1272 h23.62; Bottom Overlay "P0.0" at 1057,1273 h23.62; Bottom Overlay "P4" at 2575,1253 h27.56 r90; Bottom Overlay "P1" at 1774,1248 h27.56 r90; Bottom Overlay "P5.5" at 3050,1273 h23.62; Bottom Overlay "P4.7" at 2948,1274 h23.62; Bottom Overlay "P4.6" at 2845,1272 h23.62; Bottom Overlay "P4.4" at 2655,1272 h23.62; Bottom Overlay "P1.7" at 2554,1272 h23.62; Bottom Overlay "P1.5" at 2349,1272 h23.62; Bottom Overlay "P1.4" at 2250,1271 h23.62; Bottom Overlay "P1.3" at 2148,1272 h23.62; Bottom Overlay "P1.2" at 2048,1272 h23.62; Bottom Overlay "P1.1" at 1950,1273 h23.62; Bottom Overlay "P0.7" at 1751,1271 h23.62; Bottom Overlay "P0.6" at 1650,1272 h23.62; Bottom Overlay "P0.5" at 1550,1271 h23.62; Bottom Overlay "P0.4" at 1449,1273 h23.62; Bottom Overlay "P0.3" at 1350,1273 h23.62; Bottom Overlay "P0.1" at 1148,1273 h23.62; Bottom Overlay "P0.2" at 1251,1272 h23.62